# EAGLE board Parachute_V1.2 (EAGLE 9.6.2)
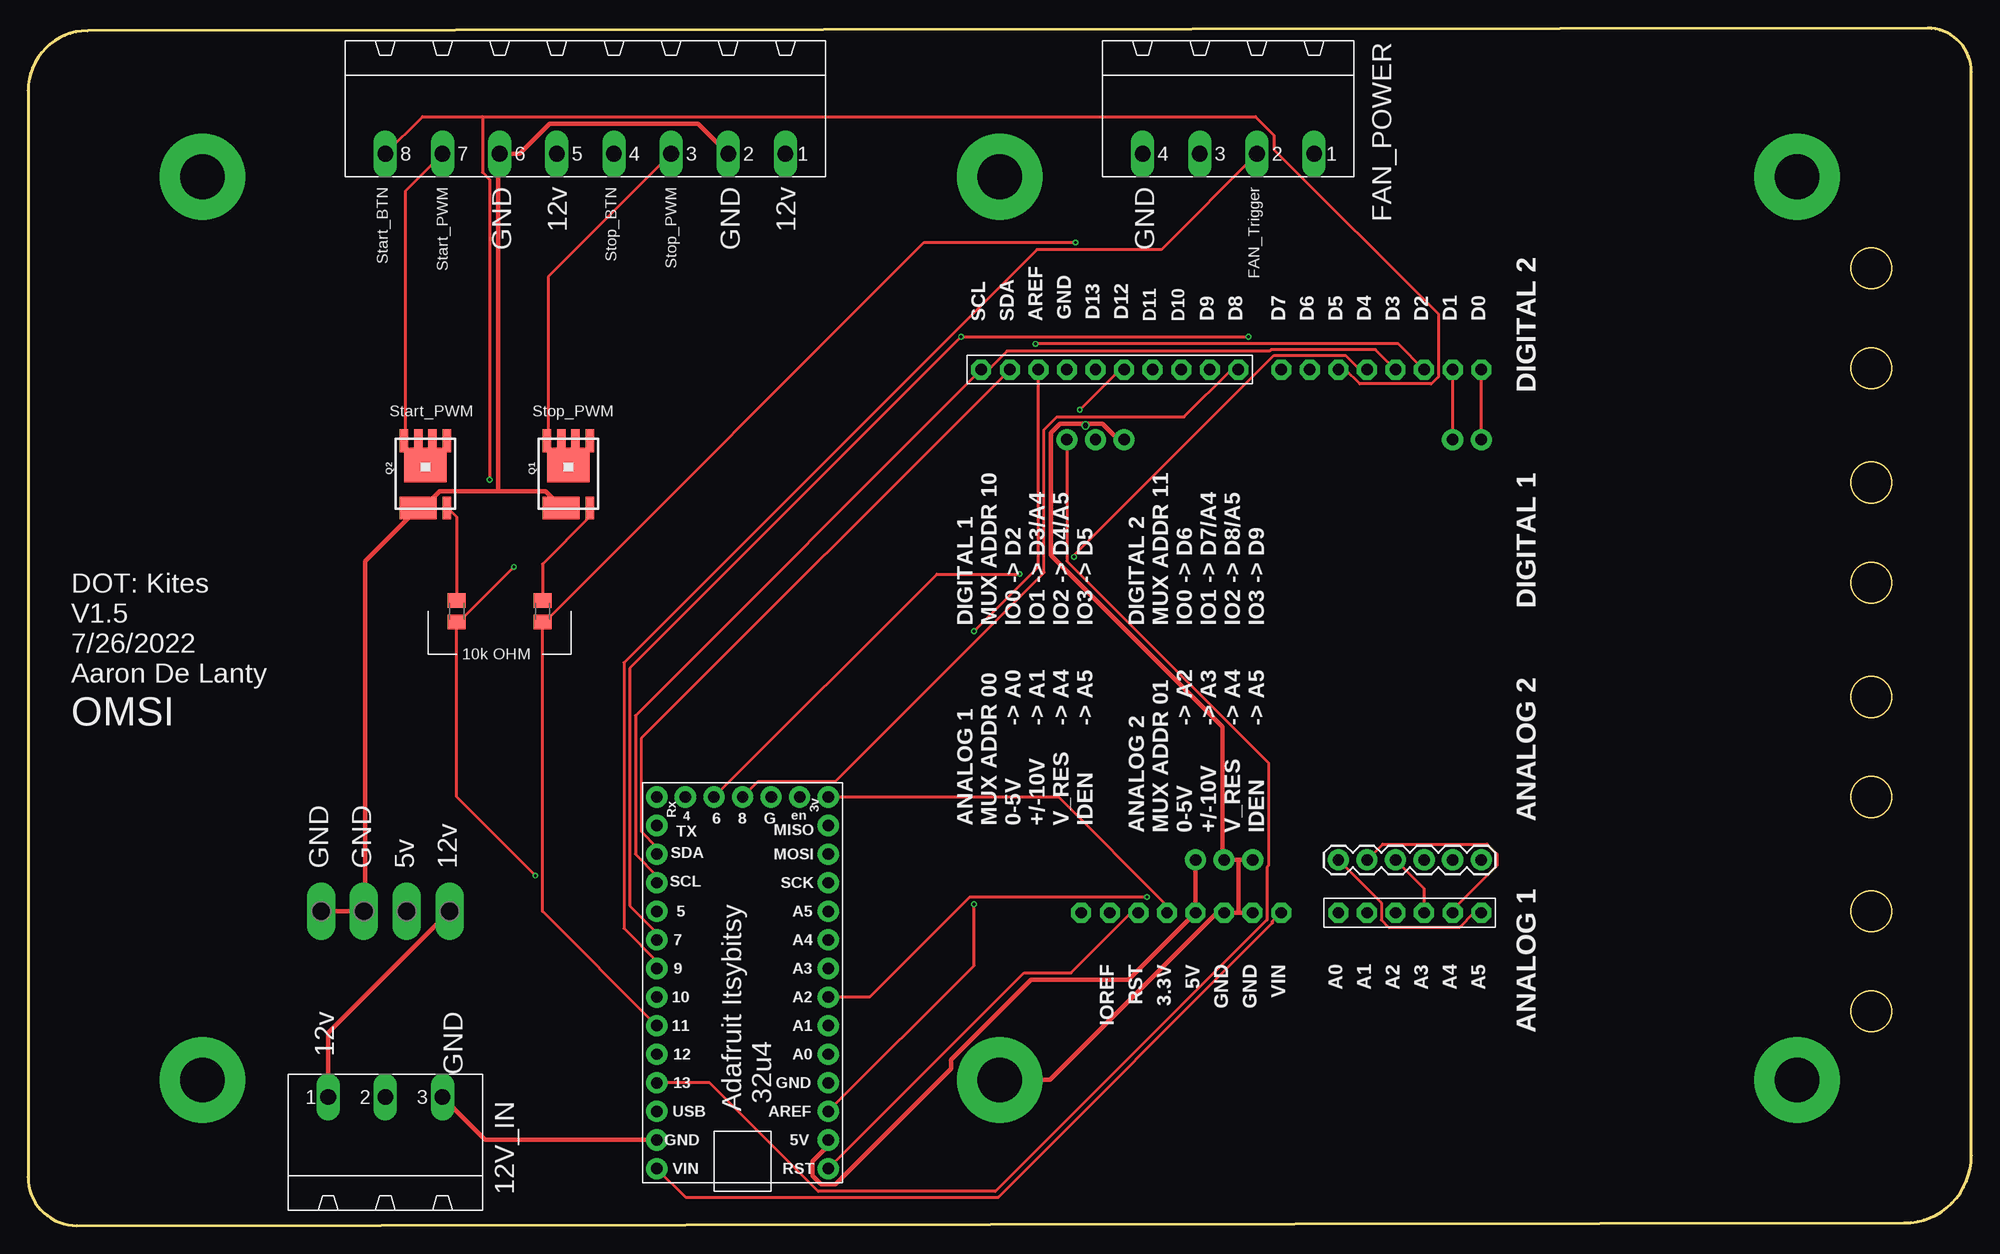
[diagram p0: board, top side]
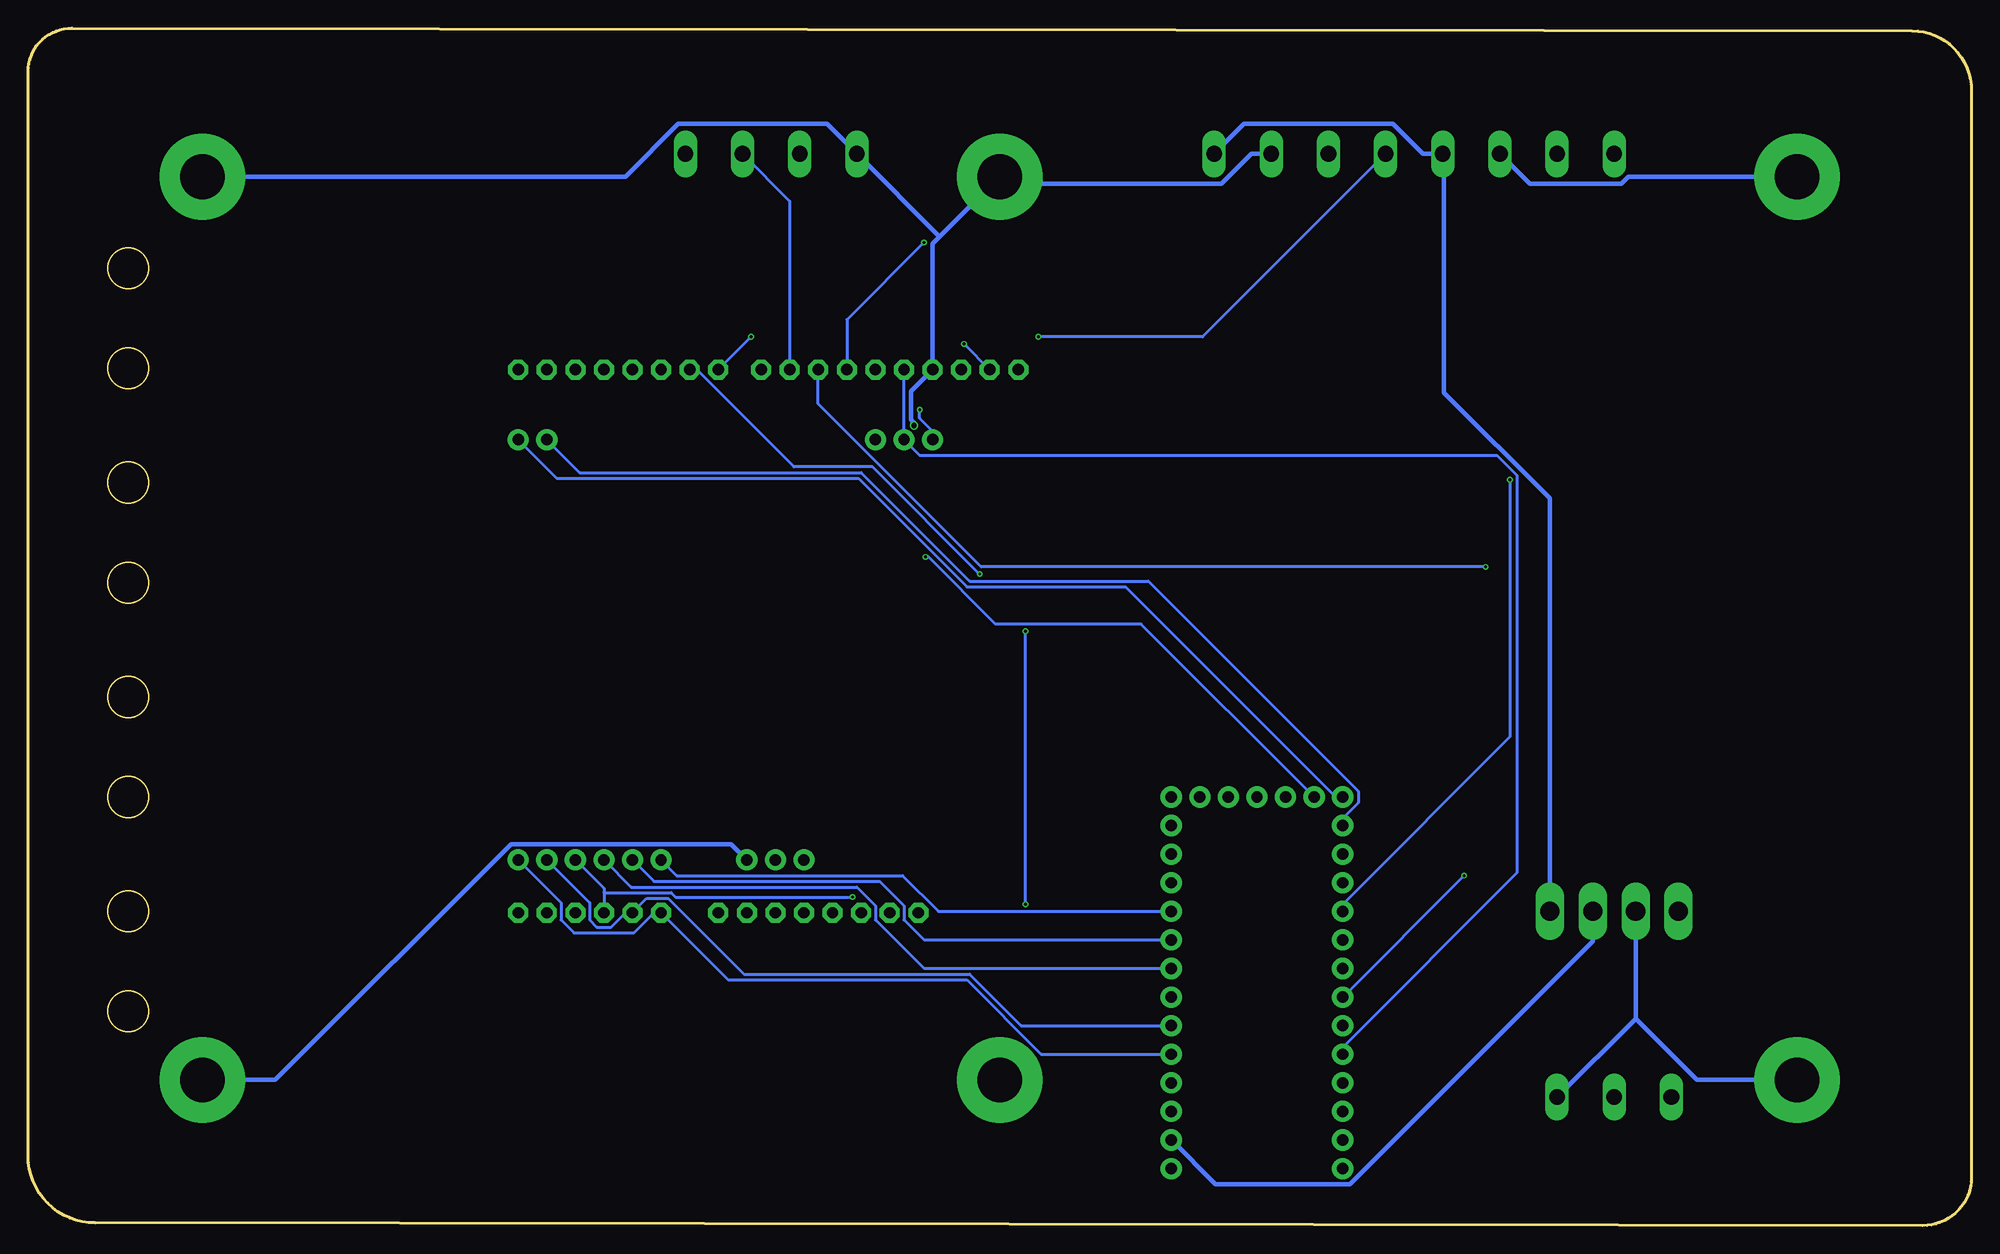
[diagram p1: board, bottom side, seen from below]

Size 172.72 x 106.41 mm. Coordinates in mm from the lower left corner, seen from the top.
Outline: 168.83,106.41 5.28,106.17 arc90 0,100.89 0,4.33 arc90 4.33,0 166.75,0.24 arc90 172.72,6.22 172.72,102.53 arc90 168.83,106.41
Outline: circle at 163.83,19.04 radius 1.8
Outline: circle at 163.83,27.93 radius 1.8
Outline: circle at 163.83,38.09 radius 1.8
Outline: circle at 163.83,46.98 radius 1.8
Outline: circle at 163.83,57.14 radius 1.8
Outline: circle at 163.83,66.03 radius 1.8
Outline: circle at 163.83,76.19 radius 1.8
Outline: circle at 163.83,85.08 radius 1.8
Copper layers (1*16): Top 0.035559375mm / dielectric 1.6mm / Bottom 0.035559375mm
Design rules "oshpark-2layer (1) *": minimum track width 10mil, minimum drill 10mil, track to track 10mil, track to pad 10mil, pad to pad 8mil, via to via 10mil, smd to smd 8mil, copper to edge 15mil, drill to drill 6mil, minimum pad ring 5mil, minimum via ring 5mil, stop-mask expansion 2.5mil, vias tented up to drill 25mil, thermal gap 10mil
Net classes: 1 High Power: width 0.406 mm, drill 0.483 mm

## Footprints (pad centres in the part's own frame; a part is rotated, then mirrored left to right if it is on the bottom)
M0805 = smd 1.3 x 1.6: 1 -0.95,0; 2 0.95,0
MSTBA3 = drill 1.397 long: 1 -5.08,5.08; 2 0,5.08; 3 5.08,5.08
MSTBA4 = drill 1.397 long: 1 -7.62,5.08; 2 -2.54,5.08; 3 2.54,5.08; 4 7.62,5.08
1X08-CLEANBIG = drill 1.016 pad 1.778 octagon: 1 -8.89,0; 2 -6.35,0; 3 -3.81,0; 4 -1.27,0; 5 1.27,0; 6 3.81,0; 7 6.35,0; 8 8.89,0
1X06-BIG = drill 1.016 pad 1.778 octagon: 1 -6.35,0; 2 -3.81,0; 3 -1.27,0; 4 1.27,0; 5 3.81,0; 6 6.35,0
1X03_NO_SILK = drill 1.016 pad 1.88: 1 0,0; 2 2.54,0; 3 5.08,0
1X02_NO_SILK = drill 1.016 pad 1.88: 1 0,0; 2 2.54,0
1X06 = drill 1.016 pad 1.88: 1 0,0; 2 2.54,0; 3 5.08,0; 4 7.62,0; 5 10.16,0; 6 12.7,0
SO-8_POWER_PAK = smd 0.762 x 2.032: D1 -3.423,2.437; D2 -2.153,2.437; D3 -0.883,2.437; D4 0.387,2.437; G 0.387,-3.532 | smd 3.81 x 3.048: D5 -1.518,0.278 | smd 3.302 x 2.032: S -2.153,-3.532
STANDOFF_ELECTRICAL_5_32 = drill 3.969 pad 7.62: P1 0,0
P2-38-17 = drill 1.702 pad 2.121 long: TP-1 -1.905,0; TP-2 1.905,0
ADAFRUIT_LENOARDO = drill 1.016 pad 1.88: 3V -10.16,-21.59; 5V -10.16,8.89; A0 -10.16,1.27; A1 -10.16,-1.27; A2 -10.16,-3.81; A3 -10.16,-6.35; A4 -10.16,-8.89; A5 -10.16,-11.43; AREF -10.16,6.35; D4 2.54,-21.59; D5 5.08,-11.43; D6 0,-21.59; D7 5.08,-8.89; D8 -2.54,-21.59; D9 5.08,-6.35; D10 5.08,-3.81; D11 5.08,-1.27; D12 5.08,1.27; D13 5.08,3.81; EN -7.62,-21.59; GND@0 -10.16,3.81; GND@1 -5.08,-21.59; GND@2 5.08,8.89; MISO -10.16,-19.05; MOSI -10.16,-16.51; RES -10.16,11.43; RX 5.08,-21.59; SCK -10.16,-13.97; SCL 5.08,-13.97; SDA 5.08,-16.51; TX 5.08,-19.05; USB 5.08,6.35; VIN 5.08,11.43
1X10-BIG = drill 1.016 pad 1.778 octagon: 1 -11.43,0; 2 -8.89,0; 3 -6.35,0; 4 -3.81,0; 5 -1.27,0; 6 1.27,0; 7 3.81,0; 8 6.35,0; 9 8.89,0; 10 11.43,0
MSTBA8 = drill 1.397 long: 1 -17.78,5.08; 2 -12.7,5.08; 3 -7.62,5.08; 4 -2.54,5.08; 5 2.54,5.08; 6 7.62,5.08; 7 12.7,5.08; 8 17.78,5.08

## Placement (x,y rotation side)
10K  [M0805]  45.72,54.6 270 top
10K1  [M0805]  38.1,54.6 270 top
12V_IN  MSTBA3  [MSTBA3]  31.75,6.34 0 top
FAN_POWER  MSTBA4  [MSTBA4]  106.68,100.32 180 top
JP1  [1X08-CLEANBIG]  120.27,76.07 180 top
JP2  [1X08-CLEANBIG]  102.49,27.81 180 top
JP3  [1X06-BIG]  122.81,27.81 0 top
JP9  [1X03_NO_SILK]  103.76,32.51 0 top
JP10  [1X03_NO_SILK]  92.33,69.84 0 top
JP11  M021X02_NO_SILK  [1X02_NO_SILK]  126.62,69.84 0 top
JP12  Male  [1X06]  116.46,32.51 0 top
Q1  MOSFET-NCH  [SO-8_POWER_PAK]  49.53,67.3 0 top
Q2  MOSFET-NCH  [SO-8_POWER_PAK]  36.83,67.3 0 top
S1  STANDOFF_ELECTRICAL5-32  [STANDOFF_ELECTRICAL_5_32]  15.49,93.21 0 top
S2  STANDOFF_ELECTRICAL5-32  [STANDOFF_ELECTRICAL_5_32]  86.36,93.21 0 top
S3  STANDOFF_ELECTRICAL5-32  [STANDOFF_ELECTRICAL_5_32]  157.23,12.95 0 top
S4  STANDOFF_ELECTRICAL5-32  [STANDOFF_ELECTRICAL_5_32]  157.23,93.21 0 top
S6  STANDOFF_ELECTRICAL5-32  [STANDOFF_ELECTRICAL_5_32]  86.36,12.95 0 top
S8  STANDOFF_ELECTRICAL5-32  [STANDOFF_ELECTRICAL_5_32]  15.49,12.95 0 top
TP1  PTR2  [P2-38-17]  27.94,27.93 0 top
TP2  PTR2  [P2-38-17]  35.56,27.93 0 top
U1  ITSYBITSY_5V  [ADAFRUIT_LENOARDO]  60.96,16.5 180 top
U$1  PINHD-1X10  [1X10-BIG]  96.14,76.07 180 top
X1  MSTBA8  [MSTBA8]  49.53,100.32 180 top

## Library data of the parts
10K 10K1 JP1-JP3 U$1 = adafruit
12V_IN = con-phoenix-508; MF: FARNELL; MPN: 1757255; OC_FARNELL: 3705183; OC_NEWARK: 71C4162
FAN_POWER = th_libraries; MF: FARNELL; MPN: 1757268; OC_FARNELL: 3705195; OC_NEWARK: 71C4163
JP9-JP12 = SparkFun-Connectors
Q1 Q2 U1 = th_ds_libraries
S1-S4 S6 S8 = th_libraries
TP1 TP2 = testpad
X1 = con-phoenix-508; MF: FARNELL; MPN: 1757307; OC_FARNELL: 3705225; OC_NEWARK: 71C4166

## Nets
5V [High Power]: JP2.4 JP9.1 TP2.TP-1 U1.5V
12V [High Power]: 12V_IN.1 TP2.TP-2 X1.1 X1.5
GND [High Power]: 12V_IN.3 FAN_POWER.4 JP2.2 JP2.3 JP9.2 JP9.3 JP10.3 Q1.S Q2.S S1.P1 S2.P1 S3.P1 S4.P1 S6.P1 S8.P1 TP1.TP-1 TP1.TP-2 U1.GND@2 U$1.7 X1.2 X1.6
N$1: Q2.D1 X1.7
N$2: Q1.D1 X1.3
N$3: JP1.1 JP11.2 U1.RX
N$4: U1.D8 U$1.1
N$5: JP1.2 JP11.1 U1.TX
N$6: U1.AREF U$1.8
N$7: 10K.1 Q1.G
N$8: JP3.1 JP12.6 U1.A0
N$9: 10K1.1 Q2.G
N$10: JP3.2 JP12.5 U1.A1
N$11: JP3.3 JP12.4 U1.A2
N$12: JP3.4 JP12.3 U1.A3
N$13: JP3.5 JP12.2 U1.A4
N$14: JP3.6 JP12.1 U1.A5
N$15: JP10.2 U1.D12 U$1.6
N$16: JP1.3 U1.SDA U$1.9
N$17: JP1.4 U1.SCL U$1.10
N$18: JP10.1 U1.D13 U$1.5
N$19: JP1.6 U1.D5 X1.8
N$20: JP1.7 U1.D6
N$21: JP1.8 U1.D7 X1.4
N$22: JP1.5 U1.D4
N$23: JP2.6 U1.RES
N$25: JP2.5 U1.3V
N$27: FAN_POWER.2 U1.D9 U$1.2
N$28: 10K1.2 U1.D10 U$1.3
N$29: 10K.2 U1.D11 U$1.4
N$31: JP2.1 U1.VIN

## Tracks (layer width: path | path; a pad name or v marks a point on that pad's centre or on a via)
5V
  Top 0.406: JP9.1 JP2.4 97.79,21.84 89.15,21.84 82.04,14.73 82.04,13.96 71.75,3.68 70.48,3.68 69.72,4.44 69.72,5.71 71.12,7.11 U1.5V
  Bottom 0.406: TP2.TP-1 33.66,25.27 55.24,3.68 67.18,3.68 U1.5V
12V
  Top 0.406: 12V_IN.1 26.67,17.14 TP2.TP-2
  Bottom 0.406: X1.1 64.64,97.91 51.44,97.91 48.77,95.24 X1.5 46.86,95.12 46.86,74.03 37.47,64.64 TP2.TP-2
GND  (via drill 0.48)
  Top 0.406: TP1.TP-1 TP1.TP-2 29.97,28.06 29.97,59.05 34.54,63.62 Q2.S 34.8,63.87 35.18,63.87 36.58,65.27 41.78,65.27 | U1.GND@2 40.64,7.61 12V_IN.3 | 41.78,65.27 45.97,65.27 47.37,63.87 Q1.S | X1.2 59.56,97.91 46.35,97.91 43.69,95.24 X1.6 41.78,95.12 41.78,65.27 | JP2.2 107.57,27.81 | 107.57,27.81 JP2.3 106.17,27.68 105.54,27.68 90.81,12.95 S6.P1 | JP9.3 107.57,32.51 | 107.57,32.51 JP9.2 106.17,32.63 106.17,44.32 90.93,59.56 90.93,70.48 91.69,71.24 93.85,71.24 v93.98,71.11 94.11,71.24 95.5,71.24 96.9,69.84 JP10.3 | 107.57,32.51 107.57,27.81
  Bottom 0.406: 29.84,18.41 TP1.TP-2 | 12V_IN.3 29.84,18.41 | S8.P1 24.38,12.95 29.84,18.41 | S1.P1 30.48,93.21 31.11,92.58 39.24,92.58 X1.6 | S3.P1 150.75,12.95 129.79,33.9 110.24,33.9 JP9.3 | 91.69,87.88 S2.P1 85.72,92.58 66.67,92.58 64.01,95.24 X1.2 | 91.69,87.88 92.33,87.24 U$1.7 94.23,74.16 94.23,71.62 93.98,71.37 v93.98,71.11 | 91.69,87.88 FAN_POWER.4 101.73,97.91 114.94,97.91 119.63,93.21 S4.P1
N$1
  Top 0.254: X1.7 33.53,91.94 33.53,69.84 Q2.D1
N$2
  Top 0.254: X1.3 46.23,84.32 46.23,69.84 Q1.D1
N$3
  Top 0.254: JP11.2 JP1.1
  Bottom 0.254: U1.RX 56.52,38.09 75.18,56.76 89.28,56.76 98.93,66.41 125.73,66.41 JP11.2
N$4
  Top 0.254: U$1.1 106.93,76.07 102.74,71.88 91.44,71.88 90.3,70.73 90.3,58.03 71.75,39.49 64.9,39.49 U1.D8
N$5
  Top 0.254: JP11.1 JP1.2
  Bottom 0.254: U1.TX 55.88,36.19 54.48,37.59 54.48,38.6 73.15,57.27 89.03,57.27 98.68,66.92 123.7,66.92 JP11.1
N$6  (via drill 0.25)
  Top 0.254: U$1.8 89.79,58.54 v84.07,52.83 | v84.07,28.57 84.07,23.11 U1.AREF
  Bottom 0.254: v84.07,28.57 v84.07,52.83
N$7
  Top 0.254: 10K.1 45.72,58.79 49.91,62.99 49.91,63.75 Q1.G
N$8
  Bottom 0.254: JP12.6 125.35,28.7 125.35,27.17 124.21,26.03 118.87,26.03 117.09,27.81 JP3.1 110.49,21.84 89.28,21.84 82.68,15.23 U1.A0
N$9
  Top 0.254: 10K1.1 38.1,62.99 37.34,63.75 Q2.G
N$10
  Bottom 0.254: JP12.5 122.81,28.7 122.81,27.17 122.17,26.54 120.9,26.54 119.63,27.81 JP3.2 117.73,29.08 115.82,29.08 109.09,22.35 89.03,22.35 84.46,17.77 U1.A1
N$11  (via drill 0.25)
  Top 0.254: U1.A2 74.8,20.31 83.69,29.2 v99.44,29.2
  Bottom 0.254: 121.54,29.58 121.54,29.97 JP12.4 | 121.54,29.58 JP3.3 | v99.44,29.2 115.19,29.2 115.57,29.58 121.54,29.58
N$12
  Top 0.254: JP3.4 124.08,29.97 JP12.3
  Bottom 0.254: U1.A3 93.09,22.85 97.41,27.17 97.41,28.44 99.06,30.09 119.13,30.09 JP12.3
N$13
  Top 0.254: JP3.5 126.62,28.06 130.56,32 130.56,33.01 129.67,33.9 120.4,33.9 JP12.2
  Bottom 0.254: U1.A4 93.09,25.39 94.87,27.17 94.87,28.44 97.03,30.6 117.09,30.6 JP12.2
N$14
  Top 0.254: JP3.6 128.52,27.81 127.25,26.54 120.9,26.54 120.27,27.17 120.27,28.7 JP12.1
  Bottom 0.254: U1.A5 91.82,27.93 95,31.11 115.06,31.11 JP12.1
N$15
  Bottom 0.254: U$1.6 JP10.2 93.47,68.45 42.16,68.45 40.39,66.67 40.39,31.36 55.88,15.87 U1.D12
N$16  (via drill 0.25)
  Top 0.254: v89.53,78.35 121.79,78.35 JP1.3 | U1.SDA 55.88,33.65 54.48,35.05 54.48,43.3 U$1.9
  Bottom 0.254: v89.53,78.35 U$1.9
N$17
  Top 0.254: JP1.4 119.76,77.84 110.49,77.84 110.36,77.72 87,77.72 85.34,76.07 U$1.10 53.98,45.33 53.98,33.01 55.88,31.11 U1.SCL
N$18  (via drill 0.25)
  Top 0.254: U$1.5 97.03,76.07 v93.47,72.51 | U1.D13 60.58,12.69 70.23,3.04 85.98,3.04 110.11,27.17 110.11,31.87 110.24,32 110.24,41.14 92.33,59.05 JP10.1
  Bottom 0.254: v93.47,72.51 93.47,71.75 92.33,70.61 JP10.1
N$19  (via drill 0.25)
  Top 0.254: JP1.6 117.09,76.07 118.36,74.8 124.71,74.8 125.35,75.43 125.35,81.02 110.74,95.62 110.74,96.89 109.09,98.55 40.39,98.55 | 40.39,98.55 35.05,98.55 X1.8 | v41.02,66.29 41.02,92.96 40.39,93.59 40.39,98.55
  Bottom 0.254: U1.D5 55.88,28.57 41.02,43.43 v41.02,66.29
N$20  (via drill 0.25)
  Top 0.254: v88.14,57.91 80.77,57.91 U1.D6
  Bottom 0.254: JP1.7 113.28,76.07 104.65,67.43 97.66,67.43 v88.14,57.91
N$21  (via drill 0.25)
  Top 0.254: v108.46,78.99 v82.93,78.99 53.47,49.52 53.47,28.44 55.88,26.03 U1.D7
  Bottom 0.254: v108.46,78.99 JP1.8 | v82.93,78.99 68.33,78.99 X1.4
N$22  (via drill 0.25)
  Top 0.254: JP1.5 118.36,76.07 117.09,77.34 110.74,77.34 92.96,59.56 v92.96,59.43
  Bottom 0.254: v92.96,59.43 92.71,59.43 86.74,53.46 73.79,53.46 U1.D4
N$23
  Top 0.254: JP2.6 98.04,27.81 92.71,22.47 88.52,22.47 U1.RES
N$25
  Top 0.254: JP2.5 101.22,28.44 91.57,38.09 U1.3V
N$27
  Top 0.254: U1.D9 55.88,23.49 52.96,26.41 52.96,50.03 89.66,86.73 100.71,86.73 FAN_POWER.2
  Bottom 0.254: U$1.2 105.03,91.05 FAN_POWER.2
N$28  (via drill 0.25)
  Top 0.254: 38.1,53.46 38.1,38.09 v45.09,31.11 | 38.1,53.46 10K1.2 38.1,53.59 | 38.1,53.46 v43.18,58.54
  Bottom 0.254: U1.D10 v45.09,31.11 | U$1.3 102.49,73.02 88.01,58.54 v43.18,58.54
N$29  (via drill 0.25)
  Top 0.254: 45.72,53.46 45.72,27.93 U1.D11 | 45.72,53.46 10K.2 45.72,53.59 | v93.09,87.37 79.63,87.37 45.72,53.46
  Bottom 0.254: U$1.4 99.95,80.51 v93.09,87.37
N$31
  Top 0.254: JP2.1 110.62,27.04 110.62,26.92 86.23,2.53 58.42,2.53 U1.VIN

## Text on the board
tPlace: SCL | DIGITAL 2 | DIGITAL 1 | -> A0 / -> A1 / -> A4 / -> A5 | ANALOG 2 | IOREF | RST | 3.3V | 5V | GND | GND | VIN | A0 | A1 | A2 | A3 | A4 | A5 | ANALOG 1 | Adafruit Itsybitsy / 32u4
tNames: Start_BTN | Start_PWM | GND | 12v | Stop_BTN | Stop_PWM | GND | 12v | GND | FAN_Trigger | SDA | AREF | GND | D13 | D12 | D11 | D10 | D9 | D8 | D7 | D6 | D5 | D4 | D3 | D2 | D1 | D0 | Start_PWM | Stop_PWM | DIGITAL 1 / MUX ADDR 10 / IO0 -> D2 / IO1 -> D3/A4 / IO2 -> D4/A5 / IO3 -> D5 | DIGITAL 2 / MUX ADDR 11 / IO0 -> D6 / IO1 -> D7/A4 / IO2 -> D8/A5 / IO3 -> D9 | 10k OHM | DOT: Kites / V1.5 / 7/26/2022 / Aaron De Lanty | OMSI | -> A2 / -> A3 / -> A4 / -> A5 | ANALOG 1 / MUX ADDR 00 / 0-5V / +/-10V / V_RES / IDEN | ANALOG 2 / MUX ADDR 01 / 0-5V / +/-10V / V_RES / IDEN | GND | GND | 5v | 12v | 12v | GND